# Altium PCB lp4200.PcbDoc
Units mil, origin at the board's own origin, x right, y up, seen from the top; angles counter-clockwise.
Board outline 2000 x 2250 mil, 2 copper layers (Top Layer, Bottom Layer); 22 components, 10 nets, 59 pads, 11 vias.
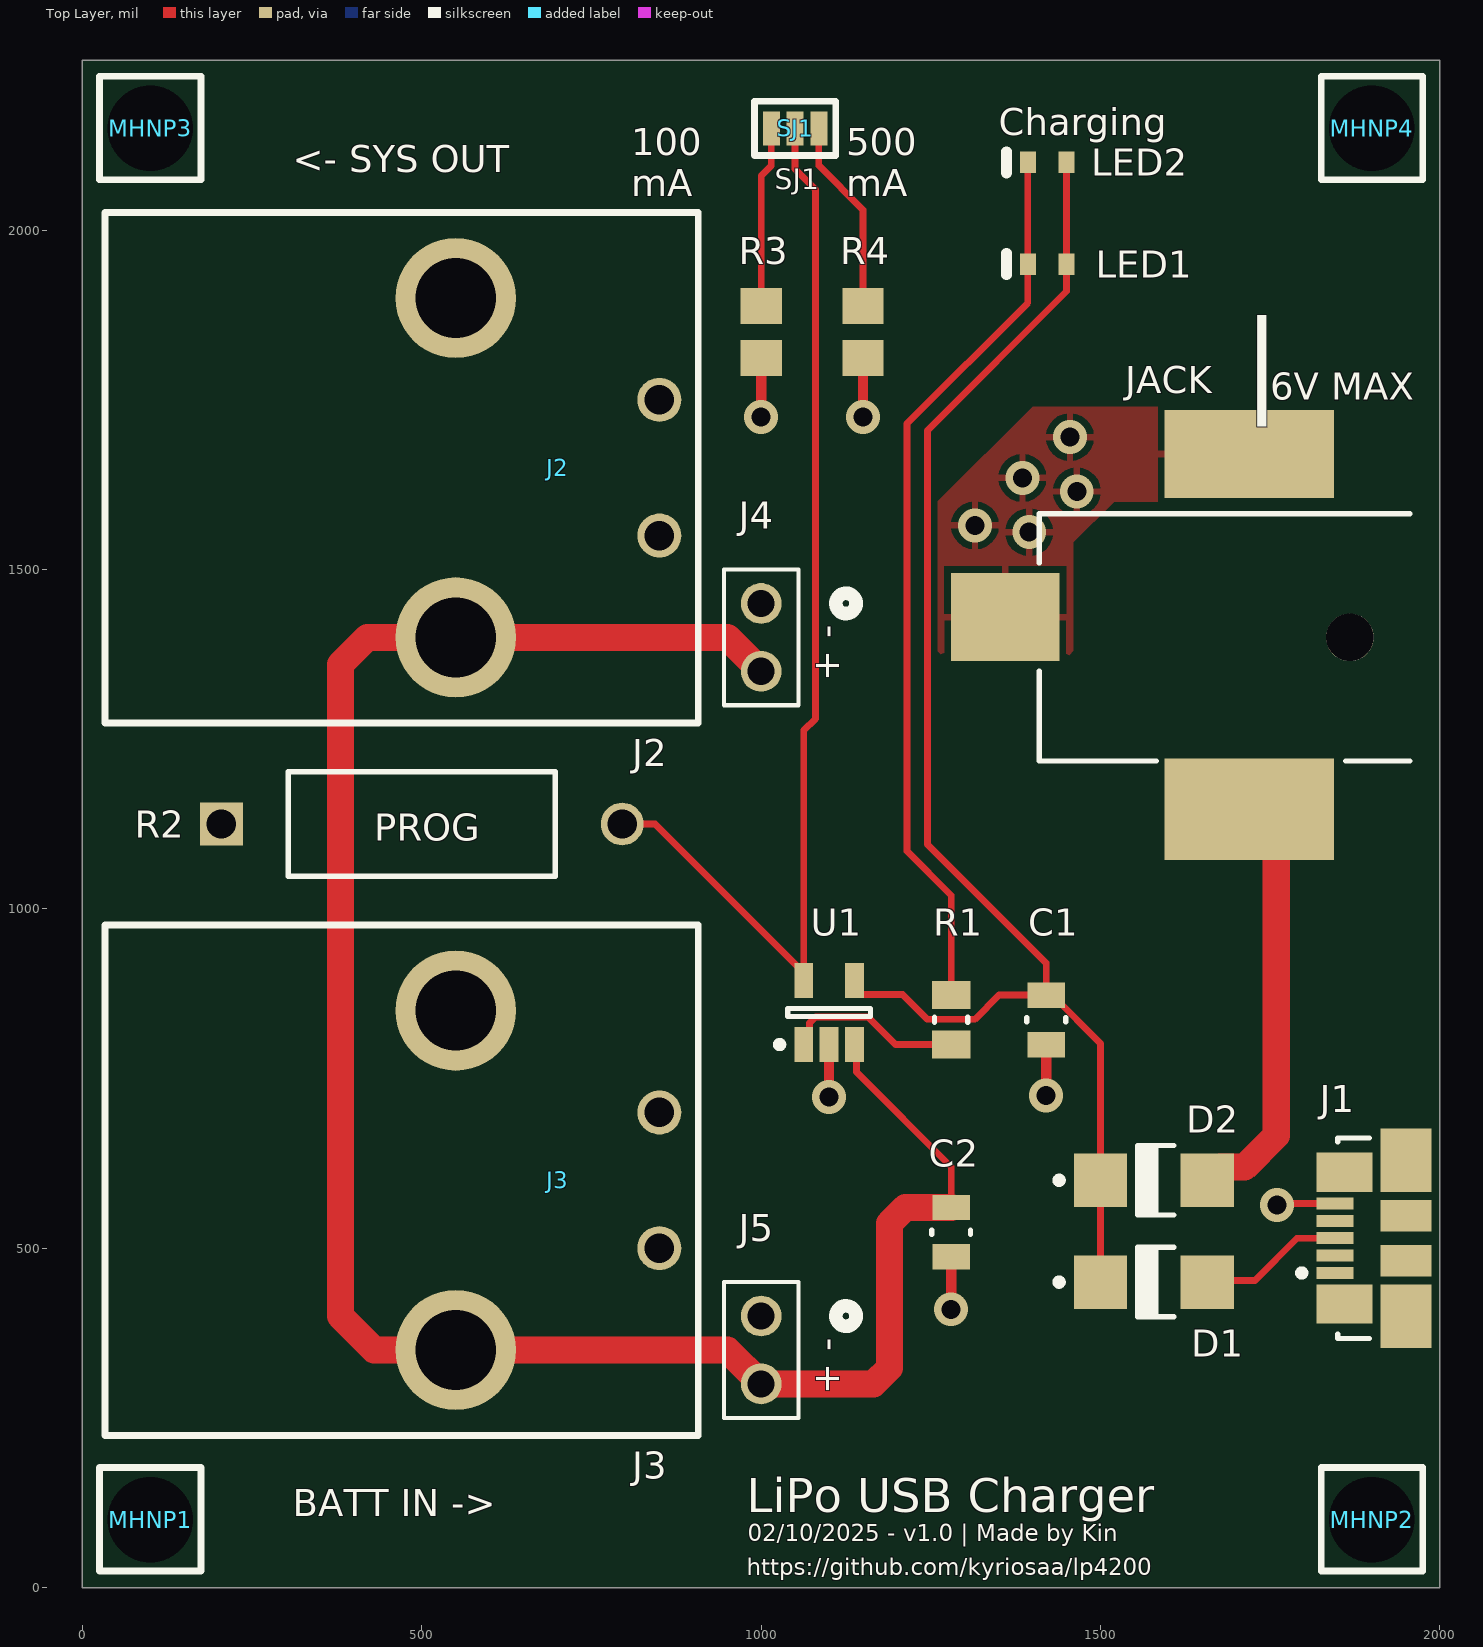
[diagram p0: Top Layer view]
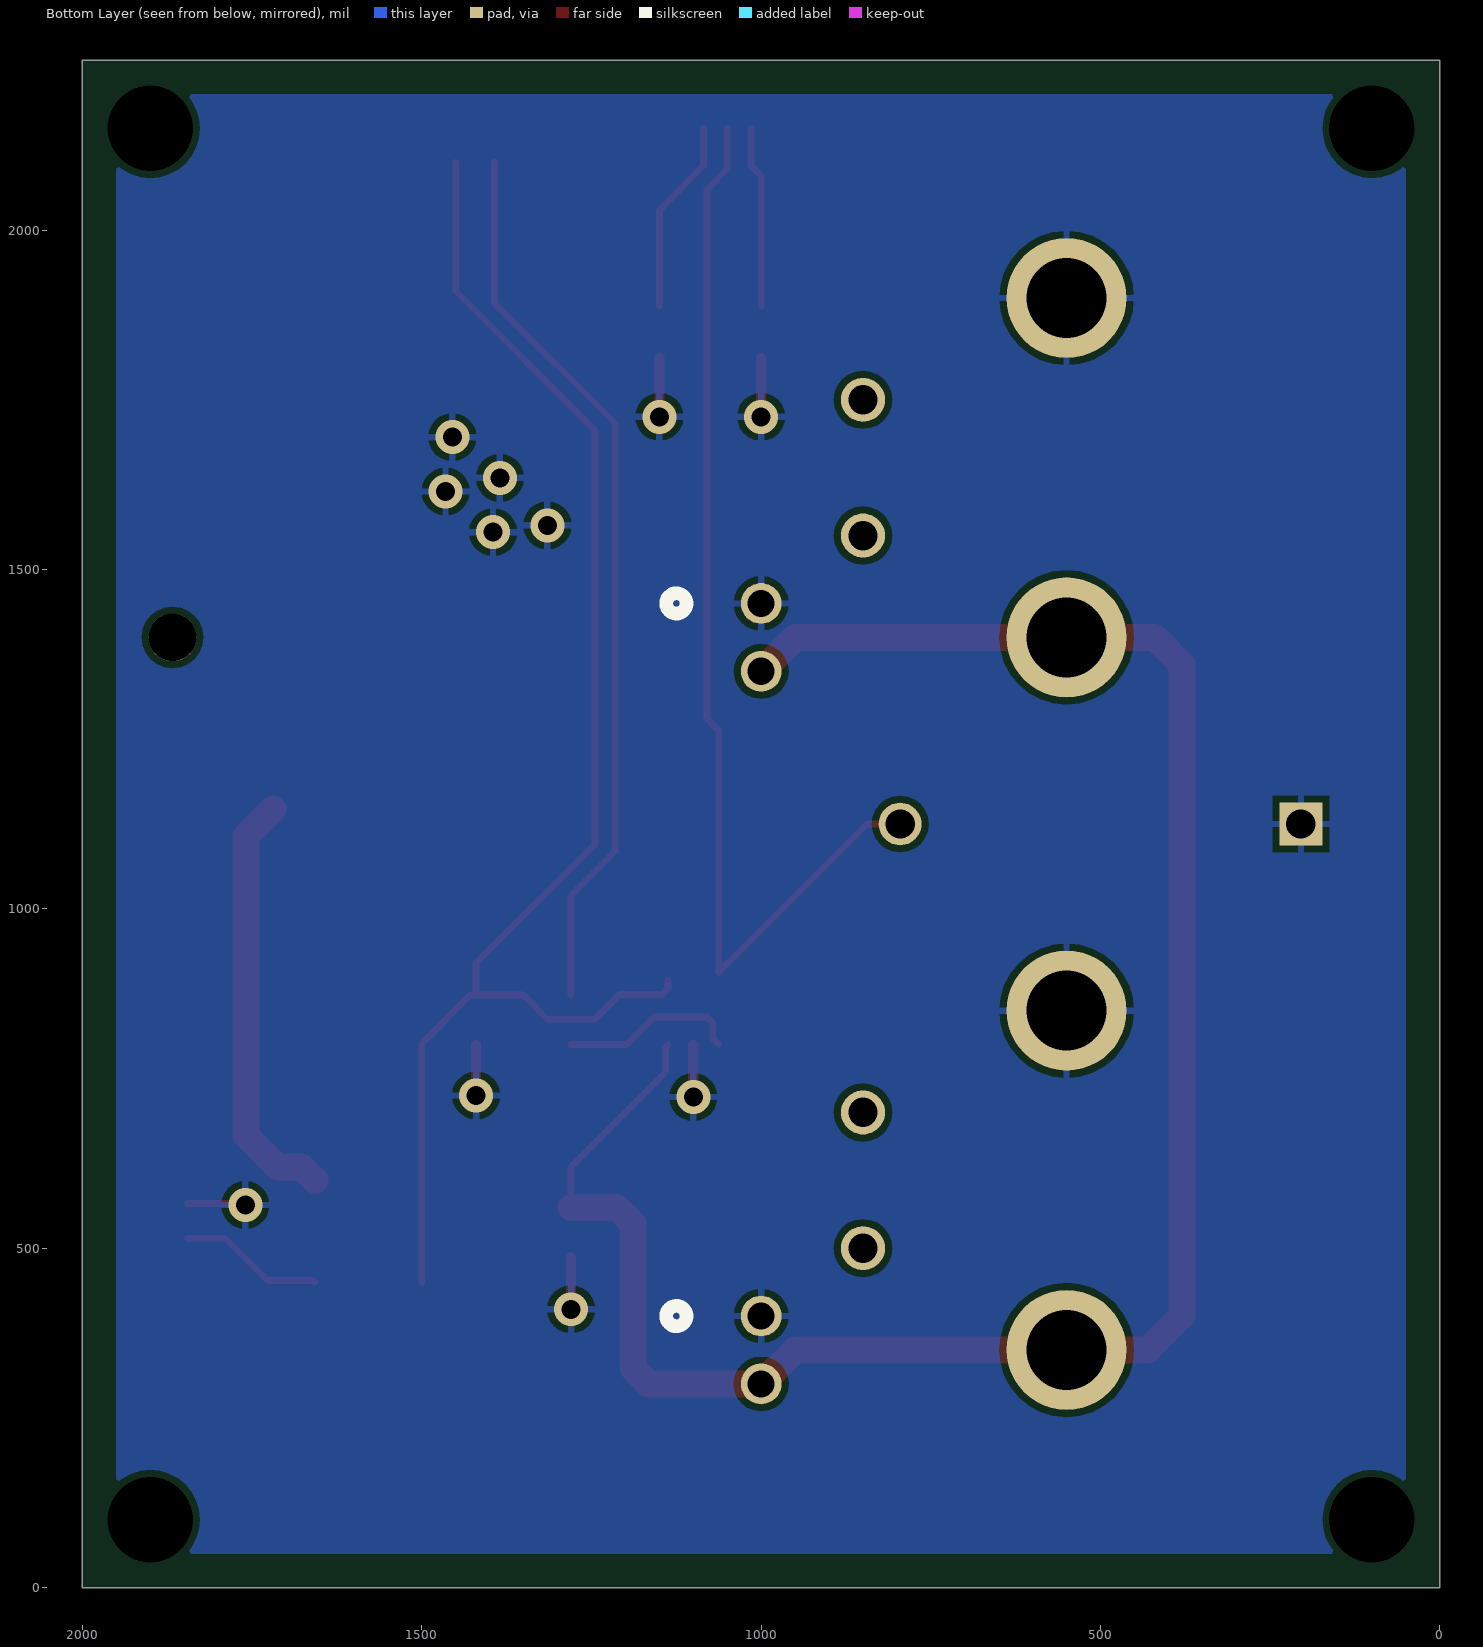
[diagram p1: Bottom Layer view, seen from below]

## Layer stack, top to bottom
Top Solder: solder mask 0.4, Solder Resist, Dk 3.5
Top Layer: signal copper 1.4
Dielectric 1: dielectric 12.6, FR-4, Dk 4.8
Bottom Layer: signal copper 1.4
Bottom Solder: solder mask 0.4, Solder Resist, Dk 3.5

## Board outline
0,0 2000,0 2000,2250 0,2250

## Design rules (kind name [scope] priority, off if disabled: settings)
Clearance [All] p1: gap=10 ignorepadtopadclearanceinfootprint=TRUE except(0: Arc-Hole Track-Hole SMDPad-Hole THPad-Hole Via-Hole Fill-Hole Poly-Hole Region-Hole Text-Hole)
PolygonConnect [All] p1: connectstyle=Relief reliefconductorwidth=10 reliefentries=4 polygonreliefangle="90 Angle" airgapwidth=10
RoutingVias [All] p1: holewidth=28 width=50 viastyle="Through Hole" minholewidth=28 minwidth=50 maxholewidth=28 maxwidth=50
SolderMaskExpansion [All] p1: expansion=4 istentingtop=FALSE
Width [All] p1: maxlimit=40 minlimit=10 preferedwidth=10
30 further rules are at their usual default settings.

## Components (designator, comment, footprint, x,y, rotation, side; value= is the part's Value field where it differs from the comment)
C1 "4.7uF" FP-CC0805-0_85-MFG 1420,836.42 r270 top value="4.7 uF"
C2 "4.7uF" FP-CC0805-0_85-MFG 1280,523.58 r270 top value="4.7 uF"
D1 "40V, 1A" ONSC-SMA-2-403D-02_V 1578.74,450 r0 top
D2 "40V, 1A" ONSC-SMA-2-403D-02_V 1578.74,600 r0 top
J1 "47346-0001" MOLX-47346-0001-5_V 1942.13,514.67 r90 top locked
J2 "CONN HEADER R/A 2POS 5.08MM" 1-179276-2 550,1900 r270 top locked
J3 "CONN HEADER R/A 2POS 5.08MM" 1-179276-2 550,850 r270 top locked
J4 "2 POS VERT HEADER 0.100\"" 2Pins_AMP 1000,1450 r180 top
J5 "2 POS VERT HEADER 0.100\"" 2Pins_AMP 1000,400 r180 top
JACK "CONN PWR JACK 2.1X5.5MM SOLDER" FP-RASM722PTR13X-MFG 1700,1400 r90 top locked
LED1 "RED" VISH-TLMS1000_V 1421.46,1950 r180 top
LED2 "RED" VISH-TLMS1000_V 1421.46,2100 r180 top
MHNP1 "Mounting Hole Non-Plated 3.2mm" MTHNP3P2MM 100,100 r90 top locked
MHNP2 "Mounting Hole Non-Plated 3.2mm" MTHNP3P2MM 1900,100 r90 top locked
MHNP3 "Mounting Hole Non-Plated 3.2mm" MTHNP3P2MM 100,2150 r90 top locked
MHNP4 "Mounting Hole Non-Plated 3.2mm" MTHNP3P2MM 1900,2150 r90 top locked
R1 "330" RESC2013X50X30NL20T20 1280,836.42 r270 top
R2 "PROG" VISH-A1-2_V2 500,1125 r0 top
R3 "2k" RESC2013X70X40ML20T20 1000,1850 r90 top
R4 "10k" RESC2013X70X40ML20T20 1150,1850 r90 top
SJ1 "SJUMPER3POS" SJUMPER3POS-Footprint-1 1050,2150 r0 top
U1 "Charge Management Controller" SOT-23-OT5_M 1100,847.24 r90 top

## Footprints (in the part's own frame and the unit in brackets; to place one, negate y for a bottom-side part, rotate by r counter-clockwise, add the part's x,y. Pads: shape width x height; smd on the part's side, far side on the other; paste and mask are expansions set on the pad)
1-179276-2 [mm]
  round 4.5 hole 3: 1(0,0) 2(12.7,0)
  round 1.65 hole 1.1: ""(3.81,7.62) ""(8.89,7.62)
  silkscreen extent -3.2,-13.13 15.9,9.08, body extent -3.02,-13.55 16.06,8.55, height 10.86
2Pins_AMP [mil]
  round 60 hole 40 mask+0: 1(0,0) 2(0,100)
  silkscreen extent -140,-50 55,150, body extent 0,0 10,10, height 10
FP-CC0805-0_85-MFG [mm]
  rect 0.95x1.4 smd paste+0 mask+0: 1(-0.925,0) 2(0.925,0)
  silkscreen extent -0.08,-0.72 0.08,0.72, body extent -1.6,-1.05 1.6,1.05, height 0.25
FP-RASM722PTR13X-MFG [mm]
  rect 3.3x4.06 smd paste+0 mask+0: 1(0.76,8.65)
  rect 3.81x6.35 smd paste+0 mask+0: 2(-6.43,-0.49)
  rect 3.3x6.35 smd paste+0 mask+0: 3(6.86,-0.49)
  round 1.78 hole 1.78 unplated paste-1000 mask+0: ""(0,-4.25)
  silkscreen extent -4.63,-6.5 4.63,7.38, body extent -8.43,-7.48 8.61,10.78, height 0.25
MOLX-47346-0001-5_V [mm] "SMD, 5-Leads, Body 7.5x5mm, Pitch 0.65mm"
  rect 0.45x1.38 smd: 1(-1.3,2.46) 2(-0.65,2.46) 3(0,2.46) 4(0.65,2.46) 5(1.3,2.46)
  rect 1.475x2.1 smd: 6(-2.462,2.1) 7(2.462,2.1)
  rect 2.375x1.9 smd: 8(-2.913,-0.2) 11(2.913,-0.2)
  rect 1.175x1.9 smd: 9(-0.837,-0.2) 10(0.837,-0.2)
  silkscreen extent -3.75,1.16 3.75,3.82, body extent -3.99,-2.78 3.99,2.65, height 2.69
MTHNP3P2MM [mm]
  round 1 hole 3.2: ""(0,0)
  silkscreen extent -1.92,-1.9 1.95,1.9
ONSC-SMA-2-403D-02_V [mm]
  rect 2x2 smd: 1(-2,0) 2(2,0)
  silkscreen extent -3.67,-1.3 0.74,1.3, body extent -2.16,-1.3 2.16,1.3, height 2.2
RESC2013X50X30NL20T20 [mm]
  rect 1.05x1.45 smd: 1(-0.925,0) 2(0.925,0)
  silkscreen extent -0.1,-0.63 0.1,0.63, body extent -1.1,-0.72 1.1,0.72, height 0.5
RESC2013X70X40ML20T20 [mm]
  rect 1.35x1.55 smd: 1(-0.975,0) 2(0.975,0)
  body extent -1.1,-0.72 1.1,0.72, height 0.7
SJUMPER3POS-Footprint-1 [mil]
  rect 25x50 smd: 1(-35,0) 2(0,0) 3(35,0)
  silkscreen extent -60,-40 60,40
SOT-23-OT5_M [mm]
  rect 1.3x0.7 smd: 1(-1.2,0.95) 2(-1.2,0) 3(-1.2,-0.95) 4(1.2,-0.95) 5(1.2,0.95)
  silkscreen extent -1.32,-1.55 0.15,1.97, body extent -0.9,-1.55 0.9,1.55, height 1.45
VISH-A1-2_V2 [mm]
  rect 1.6x1.6 hole 1.1: 1(-7.5,0)
  round 1.6 hole 1.1: 2(7.5,0)
  silkscreen extent -5,-1.95 5,1.95, body extent -7.91,-1.95 7.92,1.95, height 3.88
VISH-TLMS1000_V [mm]
  rect 0.6x0.8 smd: 1(-0.725,0) 2(0.725,0)
  silkscreen extent 1.52,-0.4 1.52,0.4, body extent -0.8,-0.4 0.8,0.4, height 0.65

## Part data
C1 C2: library part "CAP CER 4.7UF 6.3V X7R 0805", "4.7µF ±10% 6.3V Ceramic Capacitor X7R 0805 (2012 Metric)", Capacitance="4.7 uF", Manufacturer=Yageo, Manufacturer Part Number=CC0805KKX7R5BB475, Package=CC0805-0.85, Supplier Part Number 1=311-3419-1-ND, Temperature="-30°C to +85°C", Temperature Characteristic=X7R, Temperature Range High=+85°C, Temperature Range Low=-30°C, Tolerance=0.1, Voltage Rating="6.3 V", Automotive=No, Category=Cap, ComponentLink2Description=Datasheet, ComponentLink2URL=http://www.yageo.com/documents/recent/UPY-GPHC_Y5V_6.3V-to-50V_8.pdf, Device Class L1="Passive Components", Device Class L2=Capacitors, Device Class L3="Ceramic Capacitors", Digikey Description="CAP CER 4.7UF 6.3V X7R 0805", Footprint Url=http://www.yageo.com/exep/pages/download/literatures/UPY-C_GEN_24.pdf, Height=0.95mm, Ipc Land Pattern Name=CAPC200125X85, Lead Free=Yes, Material=Ceramic, Mouser Description="Multilayer Ceramic Capacitors MLCC - SMD/SMT 4.7uF 6.3V X7R 10%", Octopart=https://octopart.com/cc0805kkx7r5bb475-yageo-27548069, RoHS=TRUE, Supplier 1=Digi-Key, Supplier 2=Digi-Key, Supplier Part Number 2=311-3419-2-ND
D1 D2: library part "DIODE SCHOTTKY 40V 1A SMA", "Schottky Power Rectifier, 2-Pin SMA, Pb-Free, Cut Tape, Diode Schottky 40V 1A Surface Mount SMA", Manufacturer="ON Semiconductor", Manufacturer Part Number=MBRA140T3G, Supplier Part Number 1=MBRA140T3GOSCT-ND, ComponentLink1Description="Manufacturer URL", ComponentLink1URL=http://www.onsemi.com/, ComponentLink2Description=Datasheet, ComponentLink2URL=http://www.onsemi.cn/pub_link/Collateral/MBRA140T3-D.PDF, ComponentLink3Description="Package Specification", ComponentLink3URL=http://www.onsemi.com/pub_link/Collateral/403D-02.PDF, Configuration=Single, DatasheetVersion="Rev. 10", IFSM Max (A)=30, Mounting Technology="Surface Mount", PackageDescription="2-Pin Small Molded Package, J-Bend Lead, Body 2.605 x 4.315 mm", PackageReference=SMA-2-403D-02, PackageVersion="Rev. G, 07/2012", Packing="Tape and Reel", PartNumber=MBRA140T3G, RoHS=TRUE, Supplier 1=Digi-Key
J1: library part "CONN RCPT USB2.0 MICRO B SMD R/A", "Micro-USB B Receptacle with Flange, -30 to 85 degC, 5-Pin SMD, RoHS, Tape and Reel", Color=Black, Manufacturer=Molex, Maximum Current Rating=1.8/ContactA, Maximum Voltage Rating=30VAC, Operating Temperature=-30to85C, Supplier Part Number 1=WM17141CT-ND, Body Orientation=RightAngle, Contact Material=CopperAlloy, Contact Plating=GoldOverPalladiumNickelOverNickel, Datasheet URL=https://datasheet.ciiva.com/30075/304740473460001-io-nectors-30075527.pdf, Datasheet Version=Dec-13, Dimension=7.8x5.43x2.94mm, Gender=RCP, Housing Material=LiquidCrystalPolymer, Manufacturer Part Number=47346-0001, Manufacturer URL=http://www.molex.com/, Mounting=SurfaceMount, Number of Contacts=5, Number of Ports=1, Number of Terminals=5, Packaging=EmbossedTapeandReel, Pitch=0.65mm, RoHS=Yes, Supplier 1=Digi-Key, Termination Method=Solder, Type=MicroUSBTypeB
J2 J3: "Connector Header Through Hole, Right Angle 2 position 0.200\" (5.08mm)", Manufacturer="TE Connectivity AMP Connectors", Manufacturer Part Number=1-179276-2, Supplier Part Number 1=A29545-ND, ComponentLink1Description="Product URL", ComponentLink1URL=https://www.te.com/usa-en/product-1-179276-2.html?te_bu=Cor&te_type=other&te_campaign=oct_glo_manufacturer&elqCampaignId=26136, Supplier 1=Digi-Key
J4 J5: library part "CONN HEADER VERT 2POS 0.100\"", "Connector Header Through Hole 2 position", Manufacturer="Amphenol ICC (FCI)", Manufacturer Part Number=67997-402HLF, Supplier Part Number 1=609-5502-ND, Built_By=EMA_UL_Team, Copyright="Copyright (C) 2018 Accelerated Designs. All rights reserved", RefDes=RefDes, SourceLibrary=Amphenol_2013-08-06_Bergstik_2Row_67997, Supplier 1=Digi-Key
JACK: "Power Barrel Connector Jack 2.10mm ID (0.083\"), 5.50mm OD (0.217\") Surface Mount, Right Angle", Case/Package=SMD/SMT, Color=Black, Current Rating=5A, Manufacturer=Switchcraft, Manufacturer Part Number=RASM722PTR13X, Package Quantity=120, Supplier Part Number 1=SC2028-1-ND, Connector Type=Jack, Contact Material="Copper Alloy", Contact Plating=Tin, Gender=Male, Housing Color=Black, Housing Material=Thermoplastic, Mount="Surface Mount", Shielding=Unshielded, Supplier 1=Digi-Key, Termination=Solder
LED1 LED2: library part "LED RED 0603 SMD", "Low Current LED, 40 mW, 1.8 V, -40 to 100 degC, 2-Pin SMD (0603), RoHS, Tape and Reel", Forward Current If=2mA, Forward Voltage=1.8V, LED Colour=Red, Manufacturer=Vishay, Manufacturer Part Number=TLMS1000-GS08, Package Description="2-Pin Surface Mount Device, Body 1.6 x 0.8 mm", Package Reference=TLMS1000, Supplier Part Number 1=TLMS1000-GS08CT-ND, Automotive Qualification Standard=AEC-Q100, Bulb Size=1.6mmx0.8mm, Datasheet URL=https://datasheet.ciiva.com/5798/1698881-5798337.pdf, Datasheet Version="Rev. 1.7, 02/2011", LED Mounting=SMD, Lens Shape=Rectangular, Luminous Intensity=4mcd, Manufacturer URL=http://www.vishay.com/, Mounting Technology=SurfaceMount, MSL=MSL2-1year, Packaging=CutTape, Product Range=-, Supplier 1=Digi-Key, SVHC=ToBeAdvised, Viewing Angle=80°, Wavelength Typ=636nm
MHNP1 MHNP2 MHNP3 MHNP4: library part MTHNP3P2MM, "Mounting Hole Non-Plated 3.2 mm drill hole", Manufacturer=N/A, Manufacturer Part Number=N/A
R1: library part "RES SMD 330 OHM 1% 1/8W 0805", "330 Ohms ±1% 0.125W, 1/8W Chip Resistor 0805 (2012 Metric) Automotive AEC-Q200 Thick Film", Manufacturer=Vishay, Manufacturer Part Number=CRCW0805330RFKEA, Supplier Part Number 1=541-330CCT-ND, Supplier 1=Digi-Key
R2: library part "RES 62K OHM 2W 5% AXIAL", "Power Metal Film Leaded Resistor, 62 KOhm +/-5%, 2 W, 2-Pin THD, RoHS, Ammo Pack62 kOhms ±5% 2W Through Hole Resistor Axial Automotive AEC-Q200, Flame Retardant Coating, Safety Metal Film", Manufacturer="Vishay Semiconductor", Manufacturer Part Number=PR02000206202JR500, PartNumber=PR02000206202JA100, Power="2 W", Resistance="62 KOhm", Supplier Part Number 1=PPC62KW-2CT-ND, Temperature Coefficient="+/-250 ppm/degC", Tolerance=+/-5%, ComponentLink1Description="Manufacturer URL", ComponentLink1URL=http://www.vishay.com/, ComponentLink2Description=Datasheet, ComponentLink2URL=http://www.vishay.com/docs/28729/28729.pdf, ComponentLink3Description="Package Specification", ComponentLink3URL=http://www.vishay.com/docs/28729/28729.pdf, DatasheetVersion=Jun-13, Mounting Technology="Through Hole", PackageDescription="2-Pin Axial Lead, Body 10 x 3.9 mm", Packing="Ammo Pack", RoHS=TRUE, Supplier 1=Digi-Key
R3: library part "RES SMD 2K OHM 5% 1/8W 0805", "2 kOhms ±5% 0.125W, 1/8W Chip Resistor 0805 (2012 Metric) Automotive AEC-Q200 Thick Film", Manufacturer=Panasonic, Manufacturer Part Number=ERJ-6GEYJ202V, Supplier Part Number 1=P2.0KACT-ND, Supplier 1=Digi-Key
R4: library part "RES SMD 10K OHM 1% 1/8W 0805", "10 kOhms ±1% 0.125W, 1/8W Chip Resistor 0805 (2012 Metric) Automotive AEC-Q200 Thick Film", Manufacturer=Panasonic, Manufacturer Part Number=ERJ-6ENF1002V, Supplier Part Number 1=P10.0KCCT-ND, Supplier 1=Digi-Key
SJ1: "Solder jumper 3 pads and pins", Manufacturer=N/A, Component Type=Miscellaneous, Manufacturer Part Number=N/A, Pins=3
U1: library part "IC LI-ION/LI-POLY CTRLR SOT23-5", "Simple, Miniature Single-Cell, Fully Integrated Li-Ion/Li-Polymer Charge Management Controller, 4.2V, 5-Pin SOT-23, Industrial Temperature, Cut Tape", Manufacturer=Microchip, Manufacturer Part Number=MCP73811T-420I/OT, Supplier Part Number 1=MCP73811T-420I/OTCT-ND, Code_IPC=SOT23-5, DatasheetVersion="revB, Sep-2007", PackageDescription="5-Lead Plastic Small Outline Transistor (OT) [SOT-23]", PackageReference=SOT-23-OT5, PackageVersion="revBB, Aug-2009", Supplier 1=Digi-Key

## Via types
v1: diameter 50, hole 28, Top Layer to Bottom Layer, 11 vias

## Nets (pads, with @x,y where several pads share a name; then routed paths per layer and width w, separated by ;. In a path a pad name is that pad's centre, name@x,y a point inside that pad or via, vN(x,y) a via of type N, cw(c..) or ccw(c..) an arc to the next point about the centre after c; other vN are vias at no path point)
GND: C1.2 C2.2 J1.5 J2.1 J3.1 J4.1 J5.1 JACK.1 JACK.3 R2.1 R3.1 R4.1 U1.2 | length 489
  Top Layer w10: v1(1760.03,563.55) 1762.33,565.85 J1.5
  Top Layer w15: v1(1000,1725) R3.1 ; v1(1100,722.6) U1.2 ; v1(1150,1725) R4.1 ; v1(1280,410) C2.2 ; v1(1420,725) C1.2
  other v1: 1395,1555 1315,1565 1465,1615 1385,1635 1455,1695
NetC1_1: C1.1 D1.1 D2.1 LED1.1 LED2.1 U1.4 | length 2173.8
  Top Layer w10: U1.4 1137.4,882.68 1146.18,873.9 1208.51,873.9 1245.24,837.17 1314.76,837.17 1350.43,872.83 C1.1 ; LED2.1 LED1.1 1450,1910 1245,1705 1245,1095 1420,920 C1.1 ; D1.1 D2.1 1500,801.69 1428.86,872.83 C1.1
NetC2_1: C2.1 J2.2 J3.2 J4.2 J5.2 U1.3 | length 3090.3
  Top Layer w10: U1.3 1140.59,796.81 1140.59,759.41 1280,620 C2.1
  Top Layer w40: J4.2 950,1400 J2.2 420,1400 380,1360 380,400 430,350 J3.2 950,350 J5.2 1165.57,300 1189,323.43 1189,536.57 1212.43,560 C2.1
NetD1_2: D1.2 J1.3 | length 214.6
  Top Layer w10: D1.2 1659.98,452.5 1727.5,452.5 1789.67,514.67 J1.3
NetD2_2: D2.2 JACK.2 | length 626.2
  Top Layer w40: D2.2 1676.85,619.37 1712.37,619.37 1759,666 1759,1107.14 JACK.2
NetLED1_2: LED1.2 LED2.2 R1.1 | length 1327.8
  Top Layer w10: R1.1 1280,1020 1215,1085 1215,1715 1392.91,1892.91 LED1.2 LED2.2
NetR1_2: R1.2 U1.1 | length 264.6
  Top Layer w10: U1.1 1071.22,808.62 1071.22,831.8 1080.01,840.59 1157.39,840.59 1197.98,800 R1.2
NetR2_2: R2.2 SJ1.2 U1.5 | length 1625.4
  Top Layer w10: R2.2 800.28,1120 805.28,1125 843.9,1125 1062.6,906.3 1062.6,1262.6 1080,1280 1080,2060 1050,2090 SJ1.2
NetR3_2: R3.2 SJ1.1 | length 267.8
  Top Layer w10: R3.2 1000,2080 1015,2095 SJ1.1
NetR4_2: R4.2 SJ1.3 | length 288.5
  Top Layer w10: SJ1.3 1085,2095 1150,2030 R4.2
pads on no net: J1.1 J1.2 J1.4 J1.6 J1.7 J1.8 J1.9 J1.10 J1.11 J2. J3. JACK. MHNP1. MHNP2. MHNP3. MHNP4.

## Polygon pours and split planes (outlines as drawn)
GND on Top Layer "GND" (solid, pour order 2): 1840,1740 1860,1720 1860,1620 1840,1600 1520,1600 1460,1540 1460,1380 1420,1340 1300,1340 1260,1380 1260,1600 1400,1740
GND on Bottom Layer "GND" (solid, pour order 0): 50,2200 1950,2200 1950,50 50,50

## Silkscreen, mask and mechanical layers (free items; w line width, h text height)
Top Overlay:
  text "Charging" at 1350,2140 h40
  text "<- SYS OUT" at 310,2085 h40
  text "100 / mA" at 808.38,2050 h40
  text "500 / mA" at 1125,2050 h40
  text "|" at 1710,1750 h120
  text "6V MAX" at 1750,1750 h40
  text "+ -" at 1115,1335 h40 r90
  text "PROG" at 430,1100 h40
  text "+ -" at 1115,285 h40 r90
  text "LiPo USB Charger" at 979,111 h50
  text "BATT IN ->" at 310,105.01 h40
  text "02/10/2025 - v1.0 | Made by Kin" at 980,68 h25
  text "https://github.com/kyriosaa/lp4200" at 979,18 h25

## Text inside footprints (layer, text, board x,y; h text height)
J1: Mechanical 6 "PCB EDGE" at 2011.3,231.2 h11.81 r90
J4: Mechanical 7 "0.19in/4.826mm" at 1605,1412.5 h25 r180; Mechanical 7 "0.095in/2.413mm" at 1667.5,1365 h25 r180; Mechanical 7 "0.1in/2.54mm" at 830,1412.5 h25 r180; Mechanical 7 "0.1in/2.54mm" at 1075,875 h25 r180; Mechanical 7 "0.1in/2.54mm" at 1125,1200 h25 r180; Mechanical 7 "Alt Padstyle 2: OX90Y60D30P" at 1337.5,2180 h50 r180; Mechanical 7 "Alt Padstyle 1: OX60Y90D30P" at 1337.5,2105 h50 r180; Mechanical 7 "Right Mtg Padstyle: EX60Y60D30P" at 1387.5,2030 h50 r180; Mechanical 7 "Left Mtg Padstyle: EX60Y60D30P" at 1375,1955 h50 r180; Mechanical 7 "3rd Mtg Padstyle: EX70Y70D70P" at 1362.5,1880 h50 r180; Mechanical 7 "2nd Mtg Padstyle: EX70Y70D70P" at 1362.5,1805 h50 r180; Mechanical 7 "1st Mtg Padstyle: EX80Y80D50P" at 1362.5,1730 h50 r180; Mechanical 7 "Default Padstyle: EX60Y60D40P" at 1362.5,1655 h50 r180
J5: Mechanical 7 "0.19in/4.826mm" at 1605,362.5 h25 r180; Mechanical 7 "0.095in/2.413mm" at 1667.5,315 h25 r180; Mechanical 7 "0.1in/2.54mm" at 830,362.5 h25 r180; Mechanical 7 "0.1in/2.54mm" at 1075,-175 h25 r180; Mechanical 7 "0.1in/2.54mm" at 1125,150 h25 r180; Mechanical 7 "Alt Padstyle 2: OX90Y60D30P" at 1337.5,1130 h50 r180; Mechanical 7 "Alt Padstyle 1: OX60Y90D30P" at 1337.5,1055 h50 r180; Mechanical 7 "Right Mtg Padstyle: EX60Y60D30P" at 1387.5,980 h50 r180; Mechanical 7 "Left Mtg Padstyle: EX60Y60D30P" at 1375,905 h50 r180; Mechanical 7 "3rd Mtg Padstyle: EX70Y70D70P" at 1362.5,830 h50 r180; Mechanical 7 "2nd Mtg Padstyle: EX70Y70D70P" at 1362.5,755 h50 r180; Mechanical 7 "1st Mtg Padstyle: EX80Y80D50P" at 1362.5,680 h50 r180; Mechanical 7 "Default Padstyle: EX60Y60D40P" at 1362.5,605 h50 r180